# EAGLE board dashboard_controller (EAGLE 9.5.1)
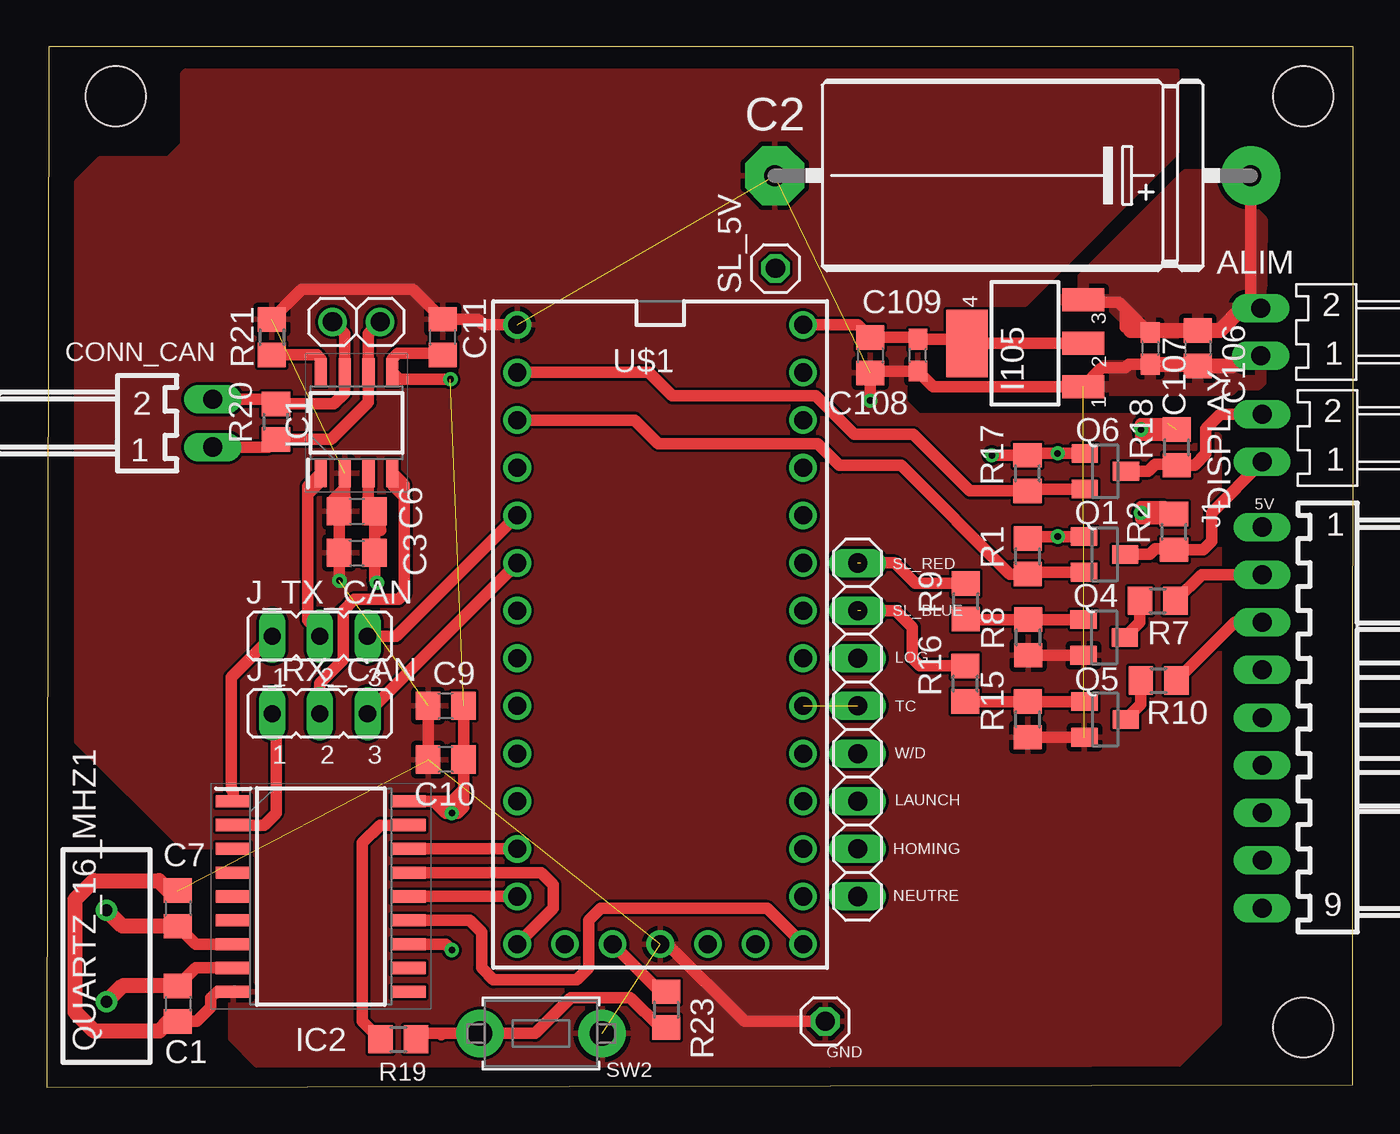
[diagram p0: board, top side]
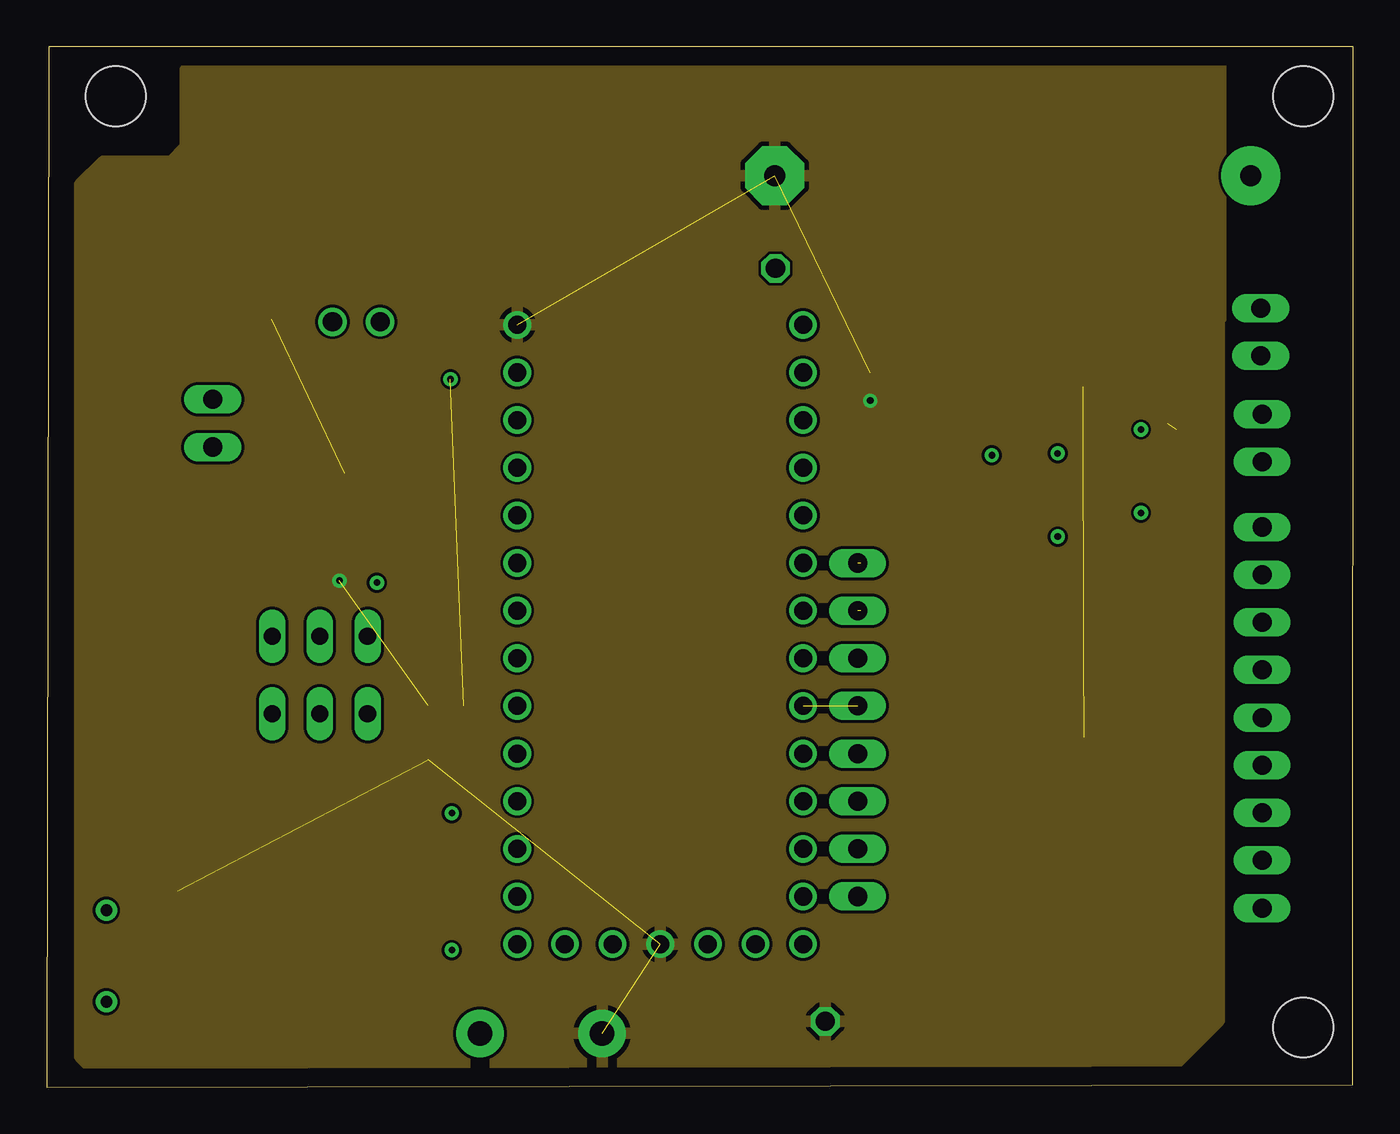
[diagram p1: board, inner layer Route2]
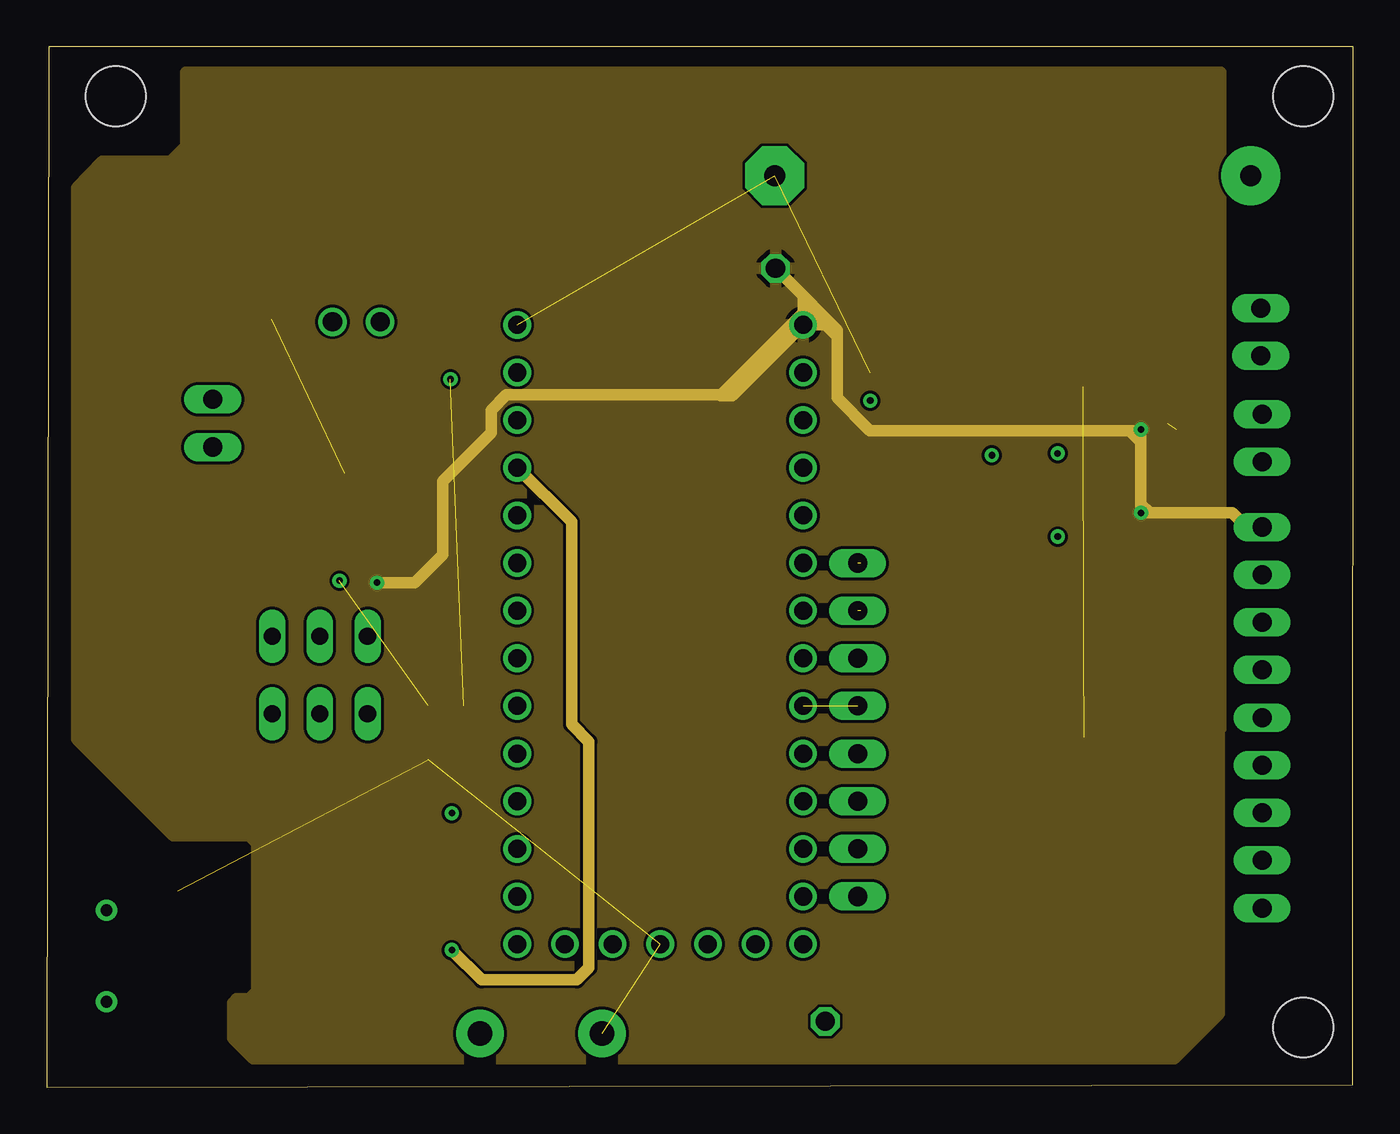
[diagram p2: board, inner layer Route15]
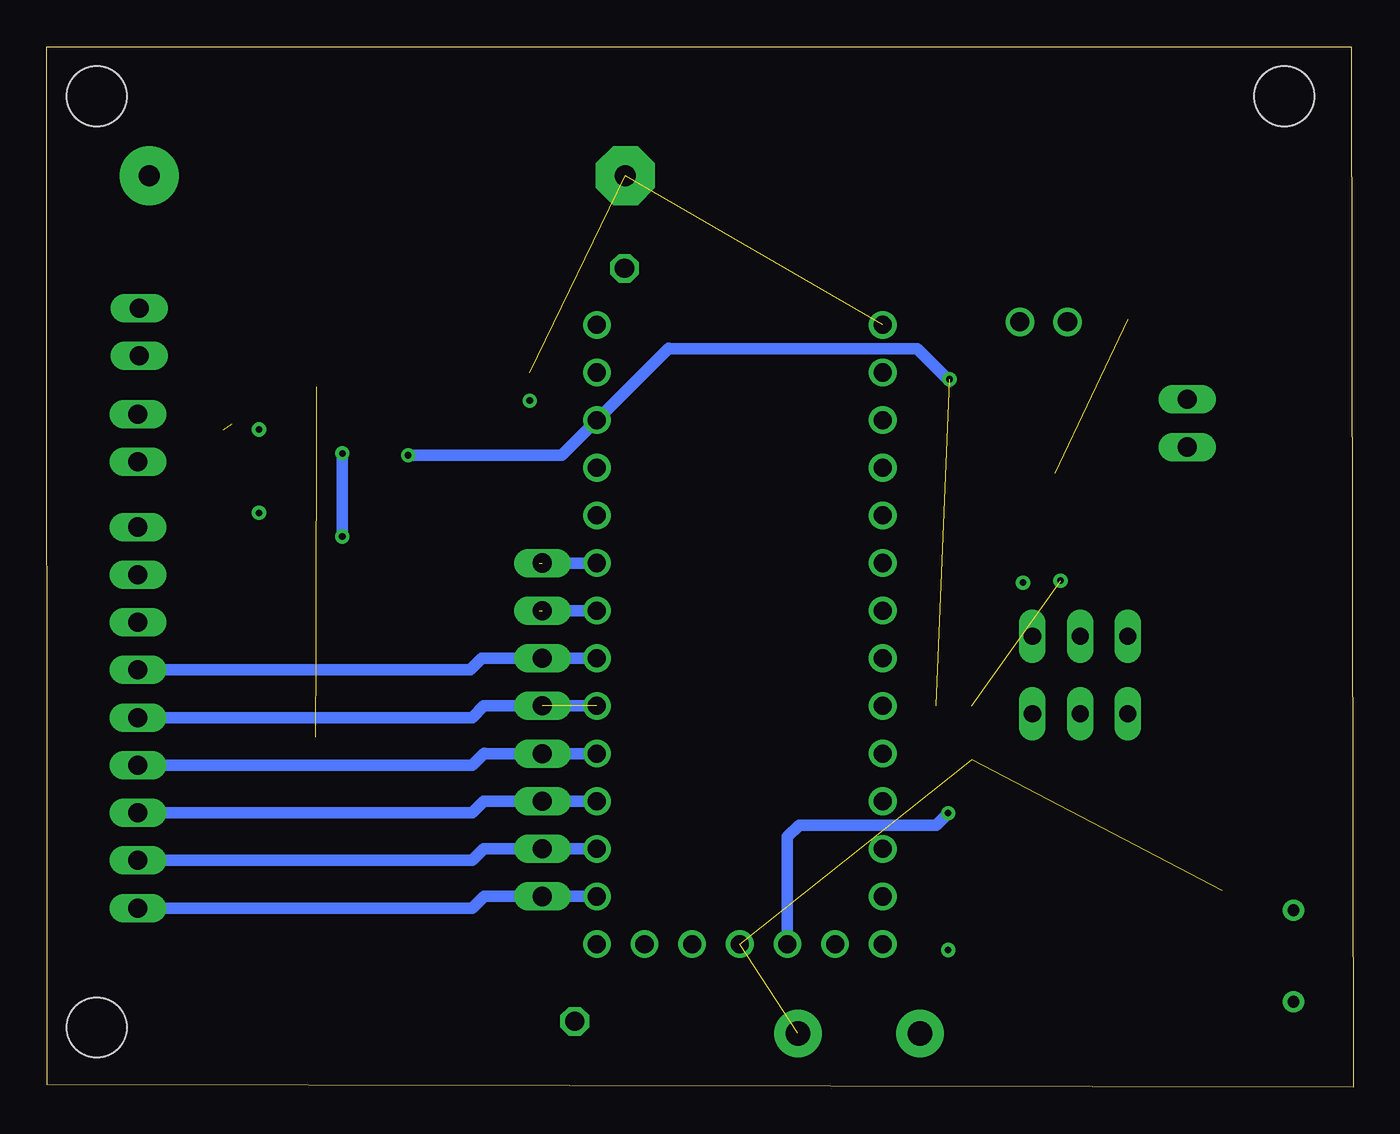
[diagram p3: board, bottom side, seen from below]

Size 69.65 x 55.46 mm. Coordinates in mm from the lower left corner, seen from the top.
Outline: 0,0 69.63,0.12 69.65,55.46 0.1,55.46 0,0
Copper layers (1+2*15+16): Top 0.035mm / dielectric 1.5mm / Route2 0.035mm / dielectric 0.15mm / Route15 0.035mm / dielectric 0.2mm / Bottom 0.035mm
Design rules "default *": minimum track width 6mil, minimum drill 0.35mm, track to track 6mil, track to pad 6mil, pad to pad 6mil, via to via 6mil, smd to smd 6mil, copper to edge 40mil, drill to drill 12mil, minimum pad ring 10mil, minimum via ring 8mil, stop-mask expansion 4mil, vias tented up to drill 0mil, thermal gap 10mil
Net classes: 0 default: width 0.61 mm
Holes 3.2 mm at 66.99,52.83 66.99,3.17 3.67,52.83

## Footprints (pad centres in the part's own frame; a part is rotated, then mirrored left to right if it is on the bottom)
7395-02 = drill 1.016 long: 1 1.27,0; 2 -1.27,0
C0805 = smd 1.3 x 1.5: 1 -0.95,0; 2 0.95,0
E25-10 = drill 1.118 pad 3.15: + -12.7,0 | drill 1.118 pad 3.15 octagon: - 12.7,0
C0603 = smd 1.1 x 1: 1 -0.85,0; 2 0.85,0
1X01 = drill 1.016 octagon: 1 0,0
LINEAR_SOT223 = smd 1.219 x 2.235: 1 -2.311,-3.099; 2 0,-3.099; 3 2.311,-3.099 | smd 3.6 x 2.2: 4 0,3.099
SOIC127P600X175-8N = smd 1.5 x 0.65: 1 -2.7,1.905; 2 -2.7,0.635; 3 -2.7,-0.635; 4 -2.7,-1.905; 5 2.7,-1.905; 6 2.7,-0.635; 7 2.7,0.635; 8 2.7,1.905
SOIC127P1030X265-18N = smd 1.85 x 0.65: 1 -4.675,5.08; 2 -4.675,3.81; 3 -4.675,2.54; 4 -4.675,1.27; 5 -4.675,0; 6 -4.675,-1.27; 7 -4.675,-2.54; 8 -4.675,-3.81; 9 -4.675,-5.08; 10 4.675,-5.08; 11 4.675,-3.81; 12 4.675,-2.54; 13 4.675,-1.27; 14 4.675,0; 15 4.675,1.27; 16 4.675,2.54; 17 4.675,3.81; 18 4.675,5.08
7395-09 = drill 1.016 long: 1 10.16,0; 2 7.62,0; 3 5.08,0; 4 2.54,0; 5 0,0; 6 -2.54,0; 7 -5.08,0; 8 -7.62,0; 9 -10.16,0
JP2 = drill 0.914 long: 1 -2.54,0; 2 0,0; 3 2.54,0
SOT23 = smd 1 x 1.4: 1 -0.95,-1.1; 2 0.95,-1.1; 3 0,1.1
HC49SLF_1 = drill 0.63 pad 1.13: 1 -2.44,0; 2 2.44,0
R0805 = smd 1.3 x 1.5: 1 -0.95,0; 2 0.95,0
TACT_PANA-EVQ = drill 1.3 pad 2.54: P$1 -3.25,0; P$2 3.25,0
1X02 = drill 1.016: 1 -1.27,0; 2 1.27,0
1X08 = drill 1.016 long: 1 -8.89,0; 2 -6.35,0; 3 -3.81,0; 4 -1.27,0; 5 1.27,0; 6 3.81,0; 7 6.35,0; 8 8.89,0
TEENSY_3.0-3.2&LC_OUTER_ROW = drill 0.965: 0 -7.62,13.97; 1 -7.62,11.43; 2 -7.62,8.89; 3 -7.62,6.35; 3.3V 7.62,11.43; 3.3V1 -2.54,-16.51; 4 -7.62,3.81; 5 -7.62,1.27; 6 -7.62,-1.27; 7 -7.62,-3.81; 8 -7.62,-6.35; 9 -7.62,-8.89; 10 -7.62,-11.43; 11 -7.62,-13.97; 12 -7.62,-16.51; 13 7.62,-16.51; 14/A0 7.62,-13.97; 15/A1 7.62,-11.43; 16/A2 7.62,-8.89; 17/A3 7.62,-6.35; 18/A4 7.62,-3.81; 19/A5 7.62,-1.27; 20/A6 7.62,1.27; 21/A7 7.62,3.81; 22/A8 7.62,6.35; 23/A9 7.62,8.89; AGND 7.62,13.97; GND -7.62,16.51; GND1 0,-16.51; PGM 2.54,-16.51; RESET/DAC 5.08,-16.51; VBAT -5.08,-16.51; VIN 7.62,16.51

## Placement (x,y rotation side)
ALIM  22-05-7028-02  [7395-02]  64.72,40.25 270 top
C1  27pF  [C0805]  6.99,4.45 270 top
C2  1000uF  [E25-10]  51.5,48.6 180 top
C3  1 µF  [C0805]  16.53,28.48 0 top
C6  27pF  [C0805]  16.53,30.7 0 top
C7  27pF  [C0805]  6.99,9.53 270 top
C9  1µF  [C0805]  21.27,20.32 180 top
C10  27pF  [C0805]  21.27,17.46 180 top
C11  0.1 µF  [C0805]  21.1,39.98 90 top
C106  10µ  [C0805]  61.37,39.39 270 top
C107  100n  [C0603]  58.83,39.39 270 top
C108  10µ  [C0805]  43.9,39.02 270 top
C109  100n  [C0603]  46.44,39.02 90 top
CONN_CAN  22-05-7028-02  [7395-02]  8.84,35.4 270 top
DISPLAY  22-05-7028-02  [7395-02]  64.8,34.6 270 top
GND  [1X01]  41.5,3.5 180 top
I105  LM1117MPX-5.0  [LINEAR_SOT223]  52.16,39.66 90 top
IC1  MCP2562-E_SN  [SOIC127P600X175-8N]  16.51,35.42 90 top
IC2  MCP2515-I_SO  [SOIC127P1030X265-18N]  14.61,10.16 0 top
J1  22-05-7098-09  [7395-09]  64.8,19.7 90 top
J_RX_CAN  [JP2]  14.56,19.91 0 top
J_TX_CAN  [JP2]  14.56,24.04 0 top
Q1  BSS138  [SOT23]  56.4,28.4 270 top
Q4  BSS138  [SOT23]  56.38,23.98 270 top
Q5  BSS138  [SOT23]  56.42,19.6 270 top
Q6  BSS138  [SOT23]  56.43,32.84 270 top
QUARTZ_16_MHZ1  FOXSLF_160-20  [HC49SLF_1]  3.17,6.99 90 top
R1  10k  [R0805]  52.3,28.3 90 top
R2  10k  [R0805]  60.1,29.6 90 top
R7  2k2  [R0805]  59.23,25.93 0 top
R8  10k  [R0805]  52.33,23.98 90 top
R9  330  [R0805]  49,25.9 90 top
R10  2k2  [R0805]  59.27,21.68 0 top
R15  10k  [R0805]  52.3,19.6 90 top
R16  330  [R0805]  48.98,21.5 90 top
R17  10k  [R0805]  52.29,32.73 90 top
R18  10k  [R0805]  60.24,34.1 90 top
R19  1k  [R0805]  18.73,2.54 0 top
R20  120  [R0805]  12.22,35.48 90 top
R21  100k  [R0805]  12,39.98 270 top
R23  1k  [R0805]  33.02,4.13 270 top
SL_5V  [1X01]  38.85,43.65 90 top
SW2  [TACT_PANA-EVQ]  26.35,2.86 0 top
TEST_CAN  [1X02]  16.5,40.8 0 top
TEST_PINS  [1X08]  43.23,19.05 270 top
U$1  TEENSY_3.1-3.2_OUTER_ROW  [TEENSY_3.0-3.2&LC_OUTER_ROW]  32.7,24.13 0 top

## Library data of the parts
ALIM DISPLAY = EP_molex_6410_7395
C1-C3 C6 C7 C9-C11 C106 C108 = rcl; SPICEPREFIX: C
C107 C109 = rcl
CONN_CAN = con-molex; MF: MOLEX; OC_FARNELL: 9731601; OC_NEWARK: unknown
GND SL_5V = pinhead
I105 = IntegratedCircuits; CASE: SOT223; MONTHLY_USAGE: _____; PART_NUMBER: LM1117IMPX-5.0; PRICE: _____; SUPPLIER: _____; TYPE: Circuito_Integrato
IC1 = MCP2562-E_SN; ALLIED_NUMBER: 70415107; DESCRIPTION: CAN Transceiver 1Mbps 5V 125degC SOIC8 CAN Transceiver 1MBps IEC 61000-4-2 Standby-Mode 8pins SOIC; HEIGHT: 1.75mm; MANUFACTURER_NAME: Microchip; MANUFACTURER_PART_NUMBER: MCP2562-E/SN; RS_PART_NUMBER: 7990228P
IC2 = MCP2515-I_SO; ALLIED_NUMBER: 70045399; DESCRIPTION: CAN Controller SPI data filtering SO18; HEIGHT: 2.65mm; MANUFACTURER_NAME: Microchip; MANUFACTURER_PART_NUMBER: MCP2515-I/SO; RS_PART_NUMBER: 1445765
J1 = con-molex; MF: MOLEX; OC_FARNELL: unknown; OC_NEWARK: unknown
J_RX_CAN J_TX_CAN = jumper
Q1 Q4-Q6 = transistor-small-signal
QUARTZ_16_MHZ1 = FOXSLF_160-20; DESCRIPTION: Crystal 16.000MHz HC49S HC-49-SLF Crystal 16MHz, ??30ppm, 2-Pin; HEIGHT: mm; MANUFACTURER_NAME: Fox; MANUFACTURER_PART_NUMBER: FOXSLF/160-20; RS_PART_NUMBER: 1734298
R1 R2 R7-R10 R15-R21 R23 = rcl; SPICEPREFIX: R
SW2 = adafruit
TEST_CAN TEST_PINS = test_pin_DTA
U$1 = Teensy_3_and_LC_Series_Boards_v1.4

## Nets
+3V3: C9.1 C10.1 C11.1 IC1.5 IC2.18 Q1.1 Q6.1 R1.2 R17.2 R23.1 U$1.3.3V U$1.3.3V1
+5V: C3.2 C6.2 C108.1 C109.2 I105.2 I105.4 IC1.3 J1.1 R2.2 R18.2 SL_5V.1 U$1.VIN
+12V: ALIM.2 C2.+ C106.1 C107.1 I105.3
AGND: U$1.AGND
CAN-RX_HARDWARE: J_RX_CAN.3 U$1.4
CAN-RXD_SOFTWARE: IC2.2 J_RX_CAN.1
CAN-TX_HARDWARE: J_TX_CAN.3 U$1.3
CAN-TXD-SOFTWARE: IC2.1 J_TX_CAN.1
CS: IC2.16 U$1.10
GND: ALIM.1 C1.2 C2.- C3.1 C6.1 C7.1 C9.2 C10.2 C11.2 C106.2 C107.2 C108.2 C109.1 GND.1 I105.1 IC1.2 IC2.9 Q4.2 Q5.2 R8.1 R15.1 R21.1 SW2.P$2 U$1.GND U$1.GND1
HOMING_BUTTON: J1.8 TEST_PINS.7 U$1.15/A1
INT: IC2.12 U$1.2
LC_BUTTON: J1.7 TEST_PINS.6 U$1.16/A2
LOG_SWITCH_PIN: J1.4 TEST_PINS.3 U$1.19/A5
N$1: CONN_CAN.2 IC1.7 R20.2 TEST_CAN.1
N$2: IC1.8 R21.2
N$3: C1.1 IC2.8 QUARTZ_16_MHZ1.1
N$4: Q4.3 R7.1
N$5: Q5.1 R15.2 R16.1
N$6: CONN_CAN.1 IC1.6 R20.1 TEST_CAN.2
N$7: C7.2 IC2.7 QUARTZ_16_MHZ1.2
N$8: Q4.1 R8.2 R9.1
N$9: Q5.3 R10.1
N$11: IC2.17 R19.1
NEUTRE_BUTTON: J1.9 TEST_PINS.8 U$1.14/A0
RESET: R19.2 R23.2 SW2.P$1
RX_CAN: IC1.4 J_RX_CAN.2
SC1_3.3V: Q1.2 R1.1 U$1.1
SC1_5V: DISPLAY.1 Q1.3 R2.1
SC2_3.3V: Q6.2 R17.1 U$1.0
SC2_5V: DISPLAY.2 Q6.3 R18.1
SCK: IC2.13 U$1.13
SI: IC2.14 U$1.11
SL_BLUE: J1.3 R10.2
SL_BLUE_PIN: R16.2 TEST_PINS.2 U$1.20/A6
SL_RED: J1.2 R7.2
SL_RED_PIN: R9.2 TEST_PINS.1 U$1.21/A7
SO: IC2.15 U$1.12
TC_SWITCH_PIN: J1.5 TEST_PINS.4 U$1.18/A4
TX_CAN: IC1.1 J_TX_CAN.2
VBAT: U$1.VBAT
W/D_SWITCH_PIN: J1.6 TEST_PINS.5 U$1.17/A3

## Tracks (layer width: path | path; a pad name or v marks a point on that pad's centre or on a via)
+3V3  (via drill 0.35)  (1 unrouted)
  Top 0.61: C11.1 21,39.13 18.71,39.13 18.41,38.84 IC1.5 18.79,37.74 v21.52,37.74 | v50.38,33.69 R17.2 52.39,33.78 v53.9,33.78 | C9.1 C10.1 | IC2.18 20.64,15.24 | R23.1 32.7,5.08 U$1.3.3V1 | 22.22,15.24 C10.1 | 20.64,15.24 21.27,14.61 v21.59,14.61 21.91,14.61 22.23,14.92 22.23,15.23 22.22,15.24 | 21.59,15.24 20.64,15.24 | C10.1 22.22,15.87 21.59,15.24 | 22.22,15.24 21.59,15.24 | Q6.1 v53.9,33.78 | v53.89,33.79 v53.9,33.79 v53.9,33.78 | R1.2 52.4,29.35 Q1.1 v53.9,29.35
  Bottom 0.61: v50.38,33.69 42.2,33.69 U$1.3.3V 36.5,39.38 36.5,39.36 23.24,39.36 21.52,37.64 v21.52,37.74 | U$1.3.3V1 30.16,13.34 29.53,13.97 22.23,13.97 v21.59,14.61 | v53.9,29.35 v53.9,33.78 v53.89,33.79
+5V  (via drill 0.35)  (1 unrouted)
  Top 0.61: IC1.3 17.14,30.97 17.78,30.34 17.78,29.7 | 17.8,29.68 17.78,29.7 | 17.78,29.7 17.48,30 C6.2 C3.2 17.48,27.01 v17.6,26.89 | I105.2 I105.4 49.06,39.81 49,39.87 C109.2 46.34,39.97 C108.1 43.23,40.64 U$1.VIN | 59.77,35.38 58.34,35.38 58.34,34.74 59.67,34.74 | 59.93,30.61 59.61,30.93 58.34,30.93 v58.34,30.61 | 59.93,30.3 58.34,30.3 | 58.34,30.3 v58.34,30.61 | 58.65,30.61 58.34,30.3 | v58.34,30.61 58.4,30.55 R2.2 | v58.34,35.06 R18.2
  Route15 0.61: U$1.VIN 40.32,40.96 | U$1.VIN 40.93,40.64 | 58.34,31.07 v58.34,30.61 58.8,30.61 | 58.34,35 v58.34,35.06 58.34,34.96 | v17.6,26.89 19.61,26.89 21.1,28.39 21.1,32.3 23.69,34.89 23.69,36.09 24.5,36.9 35.95,36.9 | U$1.VIN 36.55,36.87 35.92,36.87 35.95,36.9 | 40.01,40.96 40.32,40.96 | 40.32,40.96 40.64,40.96 40.78,41.1 | 42.14,40.02 42.14,36.74 43.88,35 57.75,35 | 42.14,40.02 41.52,40.64 U$1.VIN | 58.34,35 58.34,34.41 | 58.34,34.41 58.34,31.07 | 58.34,35 57.75,35 | 40.01,40.96 35.95,36.9 | 58.8,30.61 63.21,30.61 63.98,29.85 J1.1 | 58.34,31.07 58.8,30.61 | 57.75,35 58.34,34.41 | 40.32,42.18 SL_5V.1 42.14,40.36 42.14,40.02 | 40.32,42.18 40.32,41.5 | 40.32,41.27 U$1.VIN | 40.78,41.1 41.4,41.1 40.32,42.18 | 40.32,41.5 40.38,41.5 40.78,41.1 | 40.32,41.5 40.32,41.27 | 40.32,41.27 40.01,40.96
  pour Route15: 1.6,18.55 6.75,13.4 10.8,13.4 11.2,13 11.2,5.1 10.8,4.7 10.1,4.7 9.9,4.5 9.9,2.6 11,1.5 60.1,1.5 62.5,3.9 62.5,19.1 62.6,19.1 62.6,54.1 7.4,54.1 7.4,50.15 6.6,49.35 2.95,49.35 1.6,47.95
+12V
  Top 0.61: 58.04,40.52 57.49,40.52 57.49,41.06 | 57.49,41.5 57.14,41.85 55.37,41.85 I105.3 | 57.49,41.06 58.04,40.52 | 58.22,40.34 58.5,40.34 58.5,40.49 57.49,41.5 | 58.22,40.34 58.04,40.52 | 58.22,40.34 57.67,40.34 57.77,40.24 C107.1 | C2.+ 64.2,42.05 ALIM.2 | 57.49,41.06 57.49,41.5
  Top 0.813: 63.72,41.52 62.54,40.34 C106.1 58.5,40.34
  pour Top: 62.49,40.2 63.95,41.5 64.76,41.5 64.81,46.19 64.2,46.8 64.2,48.65 60.75,48.65 54.3,42.2 54.3,41.65 56.75,41.65 58.2,40.2
CAN-RX_HARDWARE
  Top 0.61: U$1.4 17.1,19.95 J_RX_CAN.3
CAN-RXD_SOFTWARE
  Top 0.61: J_RX_CAN.1 12.22,19.7 12.22,14.61 11.59,13.97 IC2.2
CAN-TX_HARDWARE
  Top 0.61: U$1.3 18.64,24.04 J_TX_CAN.3
CAN-TXD-SOFTWARE
  Top 0.61: IC2.1 9.93,15.79 9.84,15.88 9.84,21.86 J_TX_CAN.1
CS
  Top 0.61: U$1.10 IC2.16
GND  (via drill 0.35)  (9 unrouted)
  Top 0.61: 15.88,30.97 15.88,31.61 | 15.88,31.61 IC1.2 15.88,31.93 15.56,31.61 | 61.27,38.54 C106.2 | C9.2 C10.2 | 15.56,31.61 15.24,31.29 15.24,31.04 C6.1 C3.1 15.58,27.02 v15.6,27 | 15.56,31.61 15.88,31.61 | v43.9,36.6 C108.2 44,38.17 C109.1 47.27,37.35 I105.1 56.26,38.35 57.5,38.35 57.69,38.54 C107.2 | 6.5,10.47 C7.1 | 6.5,3.5 C1.2 8,3.5 8.75,4.25 8.75,4.75 9.08,5.08 IC2.9 | 32.72,7.6 U$1.GND1 33.08,7.62 37.2,3.5 GND.1 | R8.1 Q4.2 | Q5.2 R15.1 | R21.1 13.59,42.52 19.51,42.52 C11.2 | C11.2 20.71,40.94 | C11.2 22.98,40.94 23.27,40.64 U$1.GND
  Top 0.813: ALIM.1 63.72,38.98 63.18,38.44 C106.2 | C107.2 61.27,38.54 | 6.5,10.47 5.97,11 2.5,11 1.5,10 1.5,4 2.5,3 6,3 6.5,3.5
  pour Top: 1.6,48.25 1.6,18.45 7.25,12.8 10.7,12.8 11.2,12.3 11.2,5.5 11,5.3 10,5.3 9.8,5.1 9.8,2.6 11.2,1.2 60.3,1.2 62.5,3.4 62.5,34.7 61.4,35.8 46.45,35.8 45.75,36.5 45.75,37.3 46.45,38 46.45,39.35 46.9,39.8 48.6,39.8 50.05,41.4 50.4,41.75 52.14,41.75 60.25,49.86 60.25,54.15 7.4,54.15 7.25,54 7.25,50.25 6.5,49.5 2.85,49.5
  pour Route2: 62.6,40.98 62.6,54.4 62.38,54.62 7.75,54.62 7.38,54.25 7.38,50.12 6.62,49.38 3,49.38 1.75,48.12 1.75,1.62 2.62,0.75 59.73,0.75 62.5,3.52 62.5,40.88 62.4,40.98
  pour Top: 55.15,37.3 55.3,37.15 63.1,37.15 63.4,37.45 64.53,37.45 65.53,38.45 56.35,38.45 55.2,37.3
HOMING_BUTTON
  Bottom 0.61: J1.8 46.97,12.08 46.35,12.7 TEST_PINS.7 U$1.15/A1
INT  (via drill 0.35)
  Top 0.61: IC2.12 21.27,7.62 v21.59,7.3
  Route15 0.61: U$1.2 27.98,30.13 27.98,19.33 28.89,18.41 28.89,6.35 28.26,5.71 23.18,5.71 v21.59,7.3
LC_BUTTON
  Bottom 0.61: U$1.16/A2 TEST_PINS.6 46.36,15.24 46.98,14.62 J1.7
LOG_SWITCH_PIN
  Bottom 0.61: J1.4 47.08,22.24 46.45,22.86 TEST_PINS.3 40.33,22.86 U$1.19/A5
N$1
  Top 0.61: CONN_CAN.2 11.98,36.66 R20.2 15.3,36.43 15.88,37 IC1.7 15.88,40.16 TEST_CAN.1
N$2
  Top 0.61: R21.2 14.4,39.03 14.59,38.84 IC1.8
N$3
  Top 0.61: IC2.8 7.94,6.35 C1.1
  Top 0.813: C1.1 4.03,5.39 QUARTZ_16_MHZ1.1
N$4
  Top 0.61: R7.1 58.27,24.77 Q4.3
N$5
  Top 0.61: Q5.1 R15.2 R16.1
N$6
  Top 0.61: CONN_CAN.1 11.81,34.12 R20.1 15.17,34.53 17.14,36.5 IC1.6 17.14,40.17 TEST_CAN.2
N$7
  Top 0.61: IC2.7 7.94,7.62 C7.2
  Top 0.813: C7.2 4.03,8.57 QUARTZ_16_MHZ1.2
N$8
  Top 0.61: Q4.1 R8.2 49.12,24.93 R9.1
N$9
  Top 0.61: R10.1 58.33,20.4 Q5.3
N$11
  Top 0.61: R19.1 16.83,3.5 16.83,13.02 17.78,13.97 IC2.17
NEUTRE_BUTTON
  Bottom 0.61: U$1.14/A0 40.33,10.16 TEST_PINS.8 46.34,10.16 46.96,9.54 J1.9
RESET
  Top 0.61: R19.2 20.01,2.87 21.11,2.87 21.03,2.79 21.2,2.86 SW2.P$1 26.04,2.86 27.94,4.76 31.11,4.76 32.7,3.18 R23.2
RX_CAN
  Top 0.61: J_RX_CAN.2 14.56,21.54 15.8,22.79 15.8,25.4 16.4,26 18.75,26 19.05,26.3 19.05,31.05 19.05,31.46 19.05,31.47 | 19.05,31.47 19.05,32.11 18.44,32.72 IC1.4 18.41,32.11 19.05,31.47
SC1_3.3V
  Top 0.61: Q1.2 52.4,27.45 R1.1 51.35,27.35 45.55,33.15 42.25,33.15 41.1,34.3 32.6,34.3 31.34,35.56 U$1.1
SC1_5V
  Top 0.61: R2.1 60.5,28.65 60.45,28.7 59.1,28.7 58.8,28.4 Q1.3 | 60.15,28.6 R2.1 | R2.1 61.65,28.65 62.1,29.1 62.1,30.63 DISPLAY.1
SC2_3.3V
  Top 0.61: Q6.2 52.39,31.89 R17.1 49.22,31.79 46.2,34.8 43.05,34.8 41,36.85 33.35,36.85 32.09,38.1 U$1.0
SC2_5V
  Top 0.61: DISPLAY.2 62.57,35.87 61.8,35.1 61.8,33.76 61.2,33.16 R18.1 60.2,33.2 59.1,33.2 58.73,32.84 Q6.3
SCK
  Top 0.61: IC2.13 22.54,8.89 23.18,8.26 23.18,6.35 23.81,5.71 28.26,5.71 28.89,6.35 28.89,8.89 29.53,9.53 38.42,9.53 U$1.13
SI
  Top 0.61: U$1.11 IC2.14
SL_BLUE
  Top 0.61: 60.3,21.75 R10.2 63.33,24.78 J1.3
SL_BLUE_PIN  (1 unrouted)
  Top 0.61: R16.2 46.55,22.45 46.15,22.85 46.15,24.52 45.27,25.41 TEST_PINS.2
  Bottom 0.61: U$1.20/A6 43.4,25.4
SL_RED
  Top 0.61: R7.2 61.57,27.32 J1.2
SL_RED_PIN  (1 unrouted)
  Top 0.61: R9.2 46.3,26.85 45.2,27.95 TEST_PINS.1
  Bottom 0.61: U$1.21/A7 43.4,27.94
SO
  Top 0.61: IC2.15 26.35,11.43 26.99,10.79 26.99,9.53 U$1.12
TC_SWITCH_PIN  (1 unrouted)
  Bottom 0.61: J1.5 46.98,19.7 46.35,20.32 43.4,20.32 U$1.18/A4
TX_CAN
  Top 0.61: J_TX_CAN.2 14.56,24.25 13.92,24.89 13.92,31.61 | 13.92,31.61 13.92,32.03 IC1.1 14.61,32.29 13.92,31.61
W/D_SWITCH_PIN
  Bottom 0.61: J1.6 61.8,17.16 | 61.8,17.16 46.97,17.16 46.34,17.79 46.34,17.78 TEST_PINS.5 U$1.17/A3 | 61.8,17.16

## Text on the board
tNames: 5V | SL_RED | SL_BLUE | LOG | TC | W/D | LAUNCH | HOMING | NEUTRE